# EAGLE board desain_joystick (EAGLE 9.6.2)
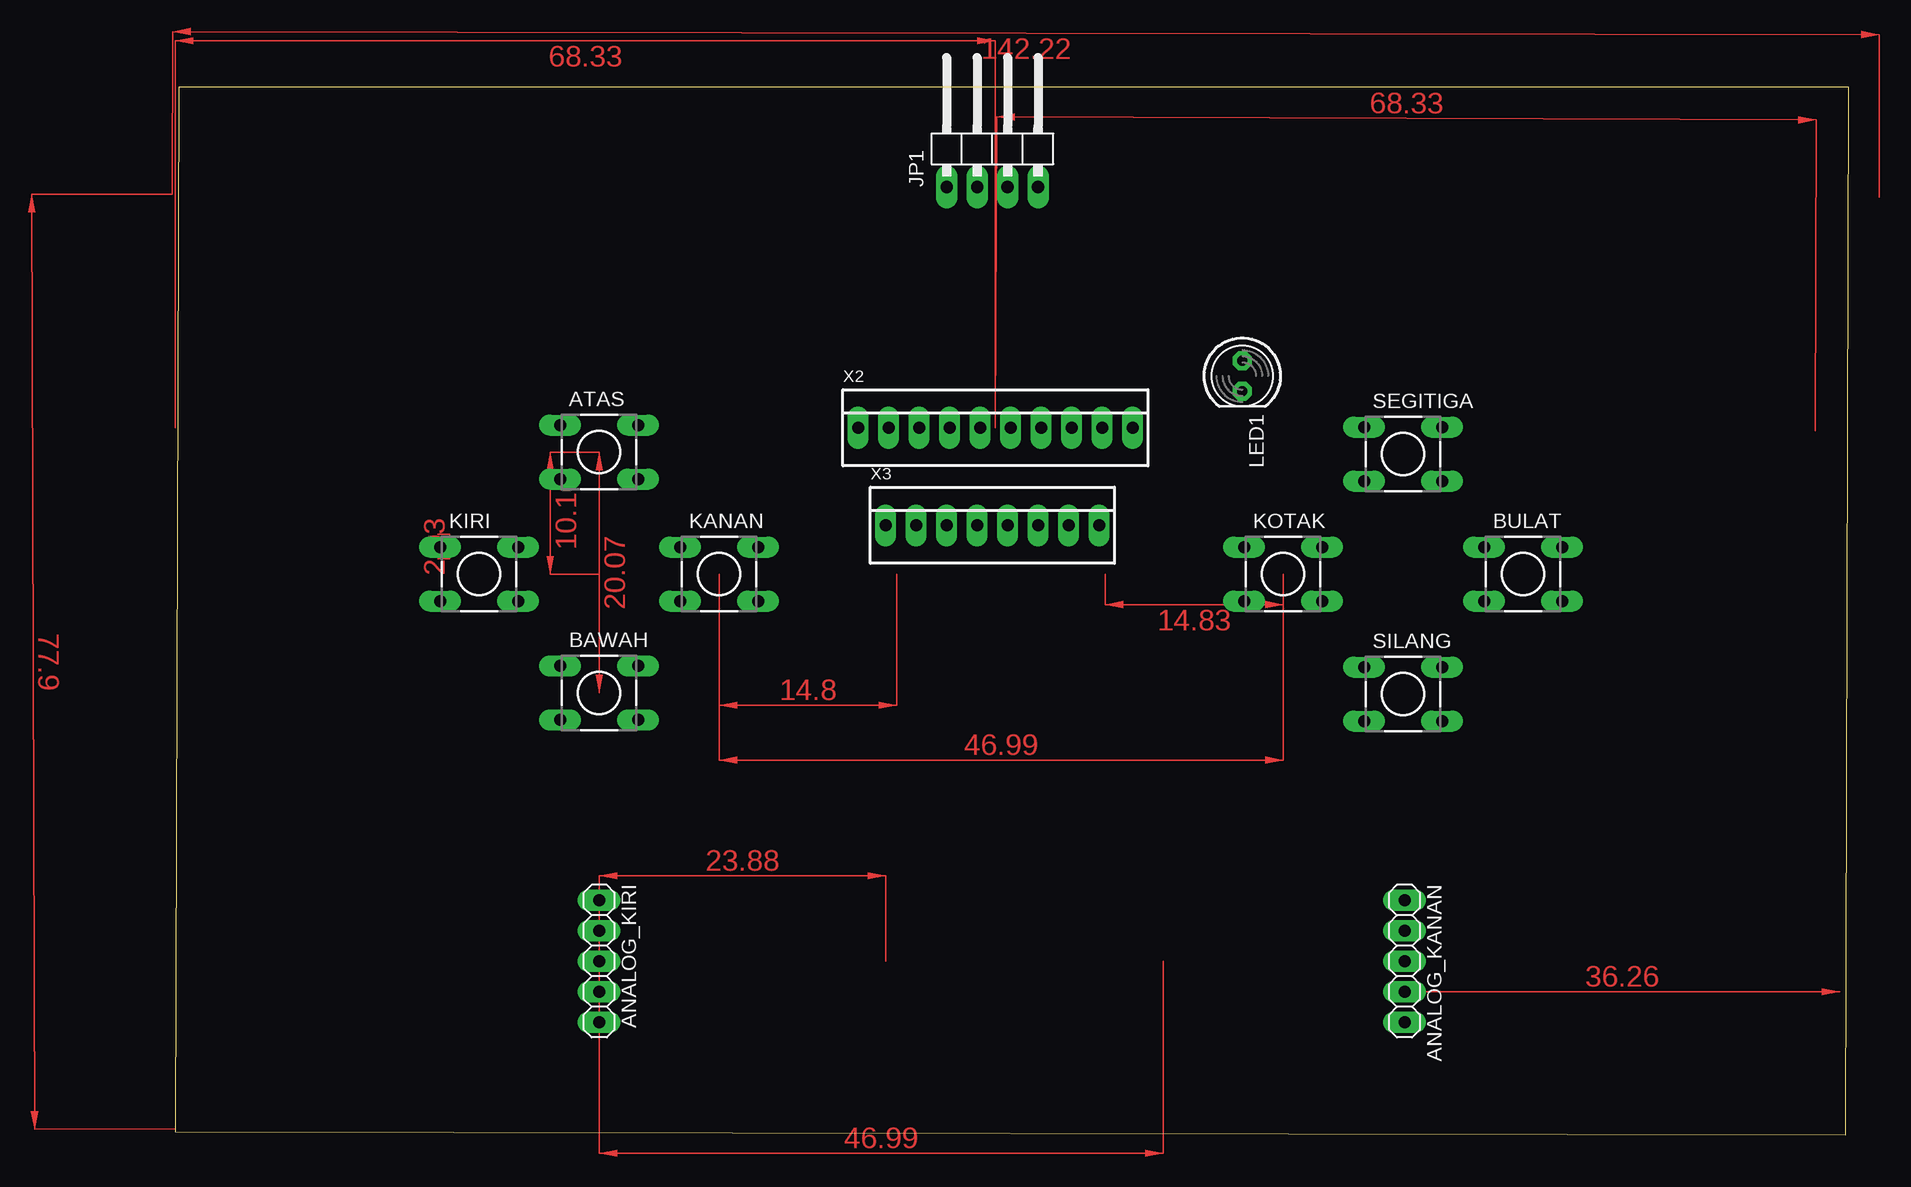
[diagram p0: board, top side]
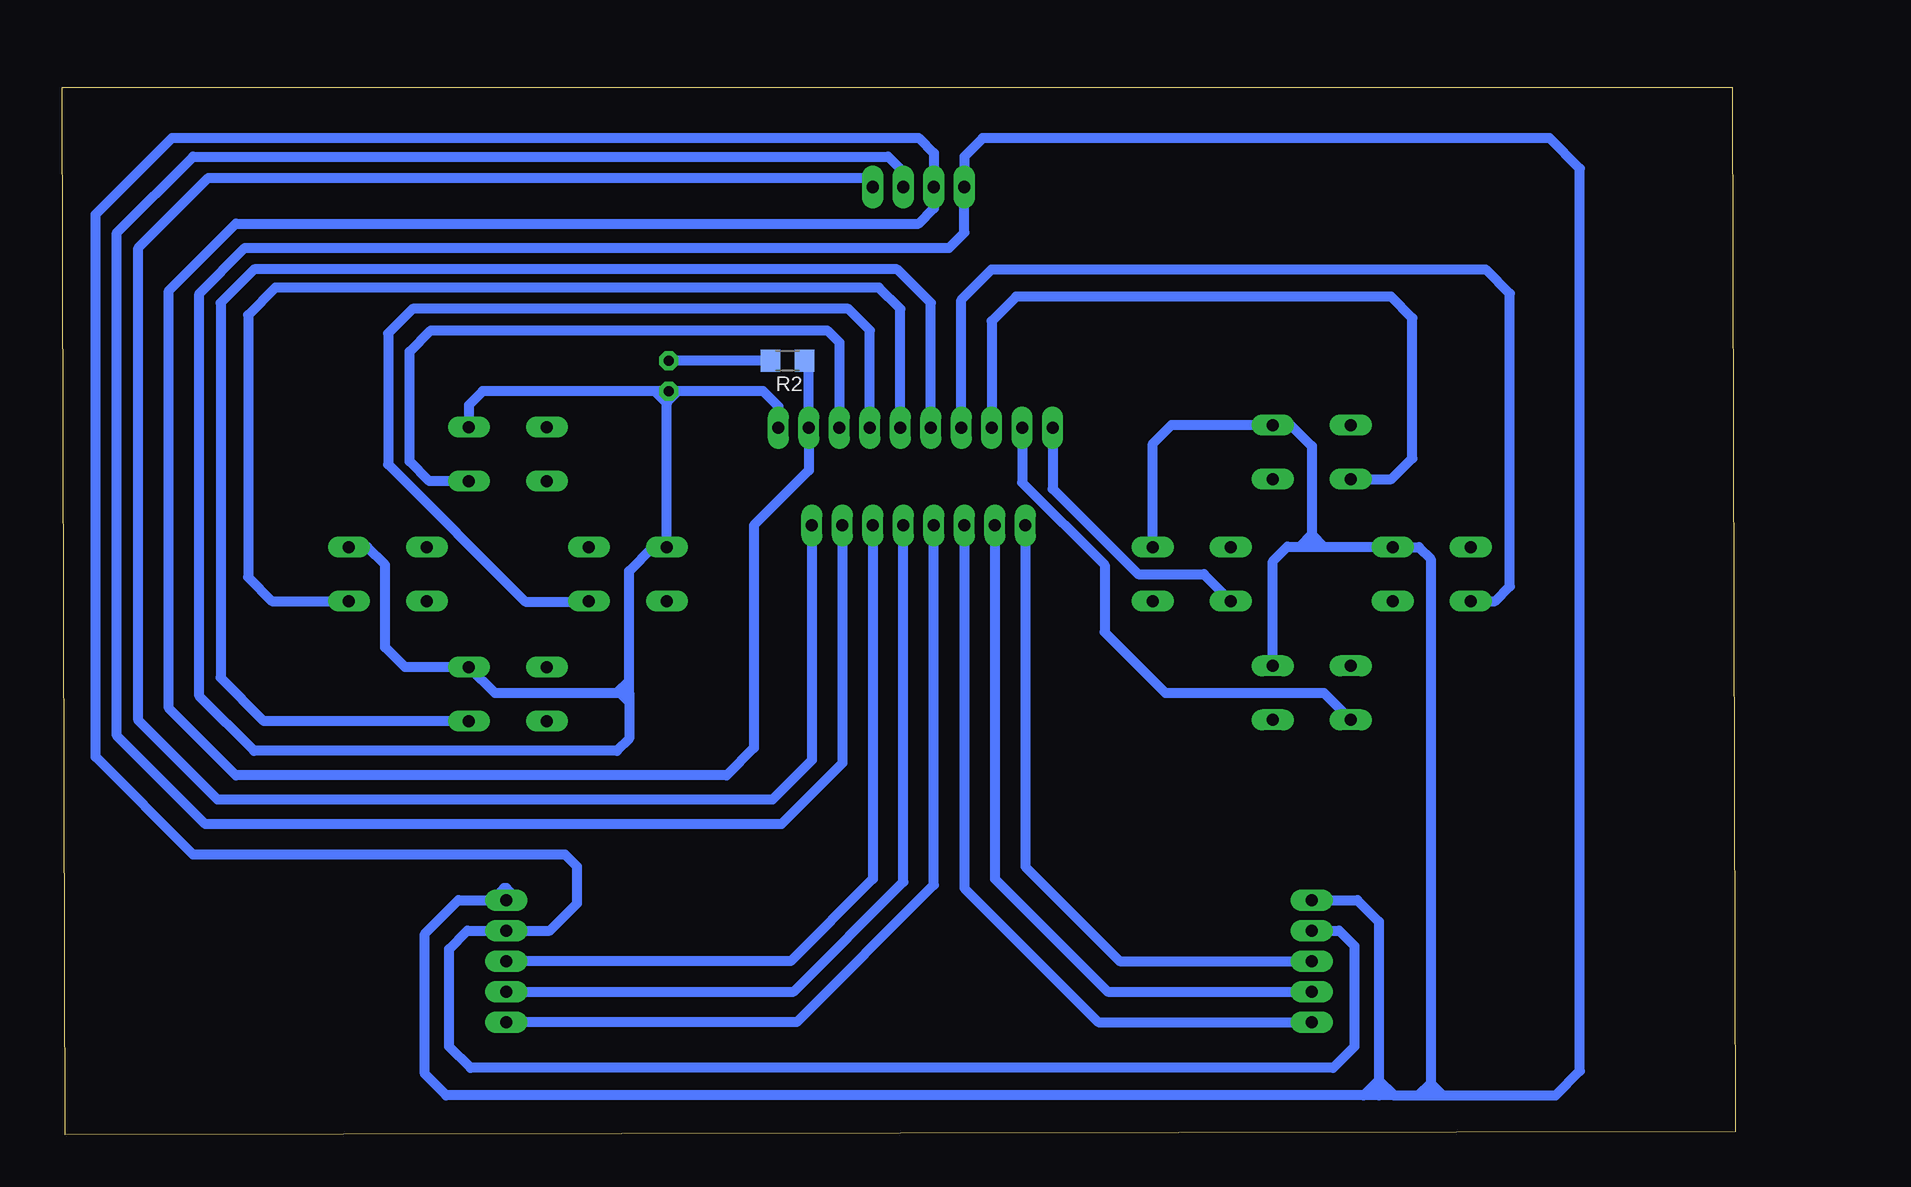
[diagram p1: board, bottom side, seen from below]

Size 139.43 x 87.3 mm. Coordinates in mm from the lower left corner, seen from the top.
Outline: 0,0.25 139.17,0 139.43,87.3 0.25,87.3 0,0.25
Copper layers (1*16): Top 0.035mm / dielectric 1.5mm / Bottom 0.035mm
Design rules "default *": minimum track width 6mil, minimum drill 0.35mm, track to track 6mil, track to pad 6mil, pad to pad 6mil, via to via 6mil, smd to smd 6mil, copper to edge 40mil, drill to drill 6mil, minimum pad ring 15mil, minimum via ring 8mil, stop-mask expansion 4mil, vias tented up to drill 0mil, thermal gap 10mil

## Footprints (pad centres in the part's own frame; a part is rotated, then mirrored left to right if it is on the bottom)
1X05 = drill 1.016 long: 1 -5.08,0; 2 -2.54,0; 3 0,0; 4 2.54,0; 5 5.08,0
DTS-6 = drill 1 long: 1 -3.25,2.25; 2 3.25,2.25; 3 -3.25,-2.25; 4 3.25,-2.25
1X04/90 = drill 1.016 long: 1 -3.81,-3.81; 2 -1.27,-3.81; 3 1.27,-3.81; 4 3.81,-3.81
LED5MM = drill 0.813 octagon: A -1.27,0; K 1.27,0
R1206 = smd 1.6 x 1.803: 1 -1.422,0; 2 1.422,0
22-23-2101 = drill 1 long: 1 -11.43,0; 2 -8.89,0; 3 -6.35,0; 4 -3.81,0; 5 -1.27,0; 6 1.27,0; 7 3.81,0; 8 6.35,0; 9 8.89,0; 10 11.43,0
22-23-2081 = drill 1 long: 1 -8.89,0; 2 -6.35,0; 3 -3.81,0; 4 -1.27,0; 5 1.27,0; 6 3.81,0; 7 6.35,0; 8 8.89,0

## Placement (x,y rotation side)
ANALOG_KANAN  [1X05]  102.43,14.48 270 top
ANALOG_KIRI  [1X05]  35.31,14.48 270 top
ATAS  DTS-6  [DTS-6]  35.31,56.9 0 top
BAWAH  DTS-6  [DTS-6]  35.31,36.83 0 top
BULAT  DTS-6  [DTS-6]  112.3,46.74 0 top
JP1  [1X04/90]  68.07,82.8 0 top
KANAN  DTS-6  [DTS-6]  45.31,46.74 0 top
KIRI  DTS-6  [DTS-6]  25.31,46.74 0 top
KOTAK  DTS-6  [DTS-6]  92.3,46.74 0 top
LED1  [LED5MM]  88.9,63.25 270 top
R2  [R1206]  78.99,64.52 180 bottom
SEGITIGA  DTS-6  [DTS-6]  102.3,56.74 0 top
SILANG  DTS-6  [DTS-6]  102.3,36.74 0 top
X2  22-23-2101  [22-23-2101]  68.33,58.93 0 top
X3  22-23-2081  [22-23-2081]  68.07,50.8 0 top

## Library data of the parts
ANALOG_KANAN ANALOG_KIRI JP1 = pinhead
ATAS BAWAH BULAT KANAN KIRI KOTAK SEGITIGA SILANG = switch-tact
LED1 = led
R2 = rcl; SPICEPREFIX: R
X2 = con-molex; MF: MOLEX; MPN: 22-23-2101; OC_FARNELL: 1756828; OC_NEWARK: 94C0765
X3 = con-molex; MF: MOLEX; MPN: 22-23-2081; OC_FARNELL: 1756826; OC_NEWARK: 01C7592

## Nets
ATAS: ATAS.3 X2.3
BAWAH: BAWAH.3 X2.2
BULAT: BULAT.4 X2.6
GND: ANALOG_KANAN.1 ANALOG_KIRI.1 ATAS.2 BAWAH.2 BULAT.2 JP1.1 KANAN.2 KIRI.2 KOTAK.1 LED1.K SEGITIGA.2 SILANG.2 X2.10
KANAN: KANAN.3 X2.1
KIRI: KIRI.3 X2.4
KOTAK: KOTAK.4 X2.7
N$1: LED1.A R2.2
SCL: JP1.3 X3.7
SDA: JP1.4 X3.8
SEGITIGA: SEGITIGA.4 X2.8
SILANG: SILANG.4 X2.5
SW1: ANALOG_KIRI.5 X3.3
SW2: ANALOG_KANAN.5 X3.4
VCC: ANALOG_KANAN.2 ANALOG_KIRI.2 JP1.2 R2.1 X2.9
VRX1: ANALOG_KIRI.3 X3.1
VRX2: ANALOG_KANAN.3 X3.6
VRY1: ANALOG_KIRI.4 X3.2
VRY2: ANALOG_KANAN.4 X3.5

## Tracks (layer width: path | path; a pad name or v marks a point on that pad's centre or on a via)
ATAS
  Bottom 0.813: ATAS.3 28.67,54.65 26.92,56.39 26.92,68.07 28.7,69.85 59.94,69.85 61.98,67.82 X2.3
BAWAH
  Bottom 0.813: BAWAH.3 34.31,36.83 47.5,36.83 52.58,41.91 52.58,47.5 59.44,54.36 X2.2
BULAT
  Bottom 0.813: X2.6 69.6,68.83 71.37,70.61 121.67,70.61 123.95,68.33 123.95,46.48 121.96,44.49 BULAT.4
GND
  Bottom 0.813: ANALOG_KANAN.1 101.41,19.56 102.43,20.57 | ANALOG_KIRI.1 31.5,19.56 29.72,17.78 29.72,4.57 | 29.72,3.3 30.99,3.3 | 30.99,3.3 107.44,3.3 109.22,5.08 109.22,16.76 106.43,19.56 103.63,19.56 | 103.63,19.56 ANALOG_KANAN.1 | X2.10 79.76,60.71 81.03,61.98 88.14,61.98 | 88.14,61.98 LED1.K | KOTAK.1 89.05,49.02 | 89.05,49.02 89.05,60.96 | 89.05,61.07 89.05,61.83 LED1.K | LED1.K 90.06,61.98 | 90.06,61.98 104.39,61.98 105.55,60.82 SEGITIGA.2 | BULAT.2 114.01,48.99 112.52,47.5 112.52,40.64 110.87,38.99 SILANG.2 103.39,36.83 93.22,36.83 | 102.43,20.57 ANALOG_KANAN.1 | 102.43,20.57 102.62,20.57 103.63,19.56 | 89.05,60.96 90.06,61.98 | 88.14,61.98 89.05,61.07 | 89.05,61.07 89.05,60.96 | 25.4,4.32 25.4,48.01 26.38,48.99 KIRI.2 28.59,49.02 34.29,49.02 | 28.45,3.3 29.72,3.3 | 29.72,4.57 29.72,3.3 | 28.45,3.3 29.72,4.57 | 29.72,4.57 30.99,3.3 | BAWAH.2 38.56,47.8 37.34,49.02 36.32,49.02 | 36.32,49.02 35.31,49.02 | 35.31,49.02 34.29,49.02 | 35.31,49.02 35.31,50.04 | 35.31,50.04 35.31,57.4 37.08,59.18 38.52,59.18 | 38.52,59.18 ATAS.2 | 35.31,50.04 34.29,49.02 | 35.31,50.04 36.32,49.02 | KANAN.2 48.56,57.62 46.99,59.18 38.52,59.18 | 28.45,3.3 26.42,3.3 | 26.42,3.3 25.15,3.3 | 25.15,3.3 24.38,3.3 | 24.38,3.3 14.99,3.3 12.95,5.33 12.95,80.52 15.49,83.06 62.74,83.06 64.26,81.53 JP1.1 64.26,75.18 65.53,73.91 124.21,73.91 128.02,70.1 128.02,36.58 123.44,32 93.22,32 92.2,33.02 92.2,36.07 | 25.4,4.32 25.4,3.56 25.15,3.3 | 24.38,3.3 25.4,4.32 | 25.4,4.32 26.42,3.3 | 92.2,36.83 92.2,37.85 | 92.2,37.85 92.2,46.99 90.17,49.02 89.05,49.02 | 92.2,36.83 92.2,36.07 | 92.2,36.83 92.96,36.83 | 92.2,37.85 93.22,36.83 | 92.2,36.07 92.96,36.83 | 92.96,36.83 93.22,36.83
KANAN
  Bottom 0.813: KANAN.3 44.31,46.74 49.78,46.74 56.9,53.85 X2.1
KIRI
  Bottom 0.813: KIRI.3 20.03,44.49 18.8,45.72 18.8,70.1 20.83,72.14 61.98,72.14 64.52,69.6 X2.4
KOTAK
  Bottom 0.813: X2.7 72.14,67.06 73.91,68.83 110.24,68.83 112.27,66.8 112.27,55.88 100.84,44.45 95.58,44.45 KOTAK.4
N$1
  Bottom 0.813: R2.2 LED1.A
SCL
  Bottom 0.813: X3.7 74.42,30.99 79.5,25.91 127.51,25.91 134.87,33.27 134.87,75.18 128.52,81.53 70.61,81.53 69.34,80.26 JP1.3
SDA
  Bottom 0.813: X3.8 76.96,31.24 80.26,27.94 126.49,27.94 133.1,34.54 133.1,73.91 127.25,79.76 72.39,79.76 71.88,79.25 JP1.4
SEGITIGA
  Bottom 0.813: SEGITIGA.4 108.84,54.49 110.49,56.13 110.49,65.28 108.71,67.06 75.69,67.06 74.68,66.04 X2.8
SILANG
  Bottom 0.813: SILANG.4 122.62,34.49 126.24,38.1 126.24,69.34 123.44,72.14 69.85,72.14 67.06,69.34 X2.5
SW1
  Bottom 0.813: ANALOG_KIRI.5 53.09,9.4 64.26,20.57 X3.3
SW2
  Bottom 0.813: ANALOG_KANAN.5 78.23,9.4 66.8,20.83 X3.4
VCC
  Bottom 0.813: ANALOG_KIRI.2 33.02,17.02 31.75,15.75 31.75,7.37 33.53,5.59 105.41,5.59 107.19,7.37 107.19,15.49 105.66,17.02 ANALOG_KANAN.2 98.81,17.02 96.52,19.3 96.52,22.35 97.54,23.37 128.52,23.37 136.65,31.5 136.65,76.71 130.28,83.08 68.07,83.08 66.8,81.81 JP1.2 66.8,77.22 68.07,75.95 124.97,75.95 130.56,70.36 130.56,35.56 124.97,29.97 84.07,29.97 81.79,32.26 81.79,50.8 77.22,55.37 X2.9 77.22,64.16 R2.1
VRX1
  Bottom 0.813: ANALOG_KIRI.3 51.31,14.48 56.77,19.94 59.18,22.35 X3.1
VRX2
  Bottom 0.813: X3.6 71.88,21.34 78.74,14.48 ANALOG_KANAN.3
VRY1
  Bottom 0.813: ANALOG_KIRI.4 52.32,11.94 61.72,21.34 X3.2
VRY2
  Bottom 0.813: ANALOG_KANAN.4 78.49,11.94 69.34,21.08 X3.5
(copper drawn outside any net)
  shapes: Top area x13